# EAGLE board CT_schematic (EAGLE 7.6.0)

Size 100 x 80 mm. Coordinates in mm from the lower left corner, seen from the top.
Outline: 0,0 100,0 100,80 0,80 0,0
Copper layers (1*16): Top 0.035mm / dielectric 1.5mm / Bottom 0.035mm
Design rules "default": minimum track width 10mil, minimum drill 24mil, track to track 8mil, track to pad 8mil, pad to pad 8mil, via to via 8mil, smd to smd 8mil, copper to edge 40mil, drill to drill 8mil, minimum pad ring 10mil, minimum via ring 8mil, stop-mask expansion 4mil, vias tented up to drill 0mil, thermal gap 10mil

## Footprints (pad centres in the part's own frame; a part is rotated, then mirrored left to right if it is on the bottom)
C0603 = smd 0.8 x 0.8: 1 -0.762,0; 2 0.762,0
C0402 = smd 0.5 x 0.5: 1 -0.508,0; 2 0.508,0
C1210 = smd 1.2 x 2.5: 1 -1.524,0; 2 1.524,0
EXV-9H = smd 3.505 x 1.676: 1 -2.857,0; 2 2.857,0
L0603 = smd 0.8 x 0.8: 1 -0.762,0; 2 0.762,0
PJ-037B_PACKAGE = drill 3.7 square: 1 12,0 | drill 3.2 square: 2 6,0
R0603 = smd 0.8 x 0.8: 1 -0.762,0; 2 0.762,0
TFBGA64 = smd 0.35 x 0.35: A1 -1.75,1.75; A2 -1.25,1.75; A3 -0.75,1.75; A4 -0.25,1.75; A5 0.25,1.75; A6 0.75,1.75; A7 1.25,1.75; A8 1.75,1.75; B1 -1.75,1.25; B2 -1.25,1.25; B3 -0.75,1.25; B4 -0.25,1.25; B5 0.25,1.25; B6 0.75,1.25; B7 1.25,1.25; B8 1.75,1.25; C1 -1.75,0.75; C2 -1.25,0.75; C3 -0.75,0.75; C4 -0.25,0.75; C5 0.25,0.75; C6 0.75,0.75; C7 1.25,0.75; C8 1.75,0.75; D1 -1.75,0.25; D2 -1.25,0.25; D3 -0.75,0.25; D4 -0.25,0.25; D5 0.25,0.25; D6 0.75,0.25; D7 1.25,0.25; D8 1.75,0.25; E1 -1.75,-0.25; E2 -1.25,-0.25; E3 -0.75,-0.25; E4 -0.25,-0.25; E5 0.25,-0.25; E6 0.75,-0.25; E7 1.25,-0.25; E8 1.75,-0.25; F1 -1.75,-0.75; F2 -1.25,-0.75; F3 -0.75,-0.75; F4 -0.25,-0.75; F5 0.25,-0.75; F6 0.75,-0.75; F7 1.25,-0.75; F8 1.75,-0.75; G1 -1.75,-1.25; G2 -1.25,-1.25; G3 -0.75,-1.25; G4 -0.25,-1.25; G5 0.25,-1.25; G6 0.75,-1.25; G7 1.25,-1.25; G8 1.75,-1.25; H1 -1.75,-1.75; H2 -1.25,-1.75; H3 -0.75,-1.75; H4 -0.25,-1.75; H5 0.25,-1.75; H6 0.75,-1.75; H7 1.25,-1.75; H8 1.75,-1.75
ABLS-25.000MHZ-B2F-T = smd 5.6 x 2.8: 1 -3.81,0; 2 5.69,0
ASEK = smd 1.4 x 1: 1 -1.1,-0.8; 2 1.1,-0.8; 3 1.1,0.8; 4 -1.1,0.8
WSON-8 = smd 0.3 x 0.6: 1 -0.75,0; 2 0.05,0; 3 0.85,0; 4 1.65,0; 5 1.65,3.8; 6 0.85,3.8; 7 0.05,3.8; 8 -0.75,3.8 | smd 3 x 2.6: PAD 0.45,1.9
SON-6 = smd 0.55 x 0.3: 1 -0.355,0.5 | smd 0.52 x 0.3: 2 -0.37,0; 3 -0.37,-0.5; 4 0.37,-0.5; 5 0.37,0; 6 0.37,0.5
SW_4-1437565-2 = smd 1.4 x 2.1: 1 -2.23,4.55; 2 -2.23,-4.55; 3 2.23,4.55; 4 2.23,-4.55
LGM67K-G1J2-24-Z = smd 0.8 x 1.4: A -2,0; C 0,0
NC7SZ125M5X = smd 1.3 x 0.7: 1 -1.3,0.95; 2 -1.3,0; 3 -1.3,-0.95; 4 1.3,-0.95; 5 1.3,0.95
DUMMY_PACKAGE_82 = drill 0.3: 1 0,-1; 2 1.5,-1

## Placement (x,y rotation side)
C1  1e-07  [C0603]  -22.86,48.26 0 top  (outside the outline)
C2  1e-07  [C0603]  -26.67,48.26 0 top  (outside the outline)
C3  1e-07  [C0603]  -30.48,48.26 0 top  (outside the outline)
C4  1e-07  [C0603]  -34.29,48.26 0 top  (outside the outline)
C5  4.7e-06  [C0603]  -19.05,48.26 0 top  (outside the outline)
C6  1e-07  [C0603]  -38.1,48.26 0 top  (outside the outline)
C7  1e-08  [C0603]  -41.91,48.26 0 top  (outside the outline)
C8  1e-06  [C0603]  -45.72,48.26 0 top  (outside the outline)
C9  1e-07  [C0603]  -49.53,48.26 0 top  (outside the outline)
C10  1e-11  [C0402]  -30.48,53.34 0 top  (outside the outline)
C11  1e-11  [C0402]  -34.29,53.34 0 top  (outside the outline)
C12  1e-08  [C0402]  -38.1,53.34 0 top  (outside the outline)
C13  1e-06  [C0603]  -53.34,48.26 0 top  (outside the outline)
C14  1e-05  [C1210]  -49.53,35.56 0 top  (outside the outline)
C15  1e-07  [C0402]  -41.91,53.34 0 top  (outside the outline)
C16  0.0001  [EXV-9H]  -38.1,27.94 0 top  (outside the outline)
C17  0.0001  [EXV-9H]  -49.53,27.94 0 top  (outside the outline)
C18  1e-08  [C0402]  -45.72,53.34 0 top  (outside the outline)
F1  240.0  [L0603]  -15.24,53.34 0 top  (outside the outline)
J1  PJ-037B  [PJ-037B_PACKAGE]  -27.94,7.62 0 top  (outside the outline)
R2  1000.0  [R0603]  -19.05,53.34 0 top  (outside the outline)
R4  4700.0  [R0603]  -22.86,53.34 0 top  (outside the outline)
R5  10000.0  [R0603]  -48.26,41.91 0 top  (outside the outline)
R6  100000.0  [R0603]  -27.94,41.91 0 top  (outside the outline)
R7  153694.38  [R0603]  -22.86,41.91 0 top  (outside the outline)
R8  100000.0  [R0603]  -33.02,41.91 0 top  (outside the outline)
R9  10000.0  [R0603]  -53.34,41.91 0 top  (outside the outline)
R10  10000.0  [R0603]  -15.24,48.26 0 top  (outside the outline)
R11  9100.0  [R0603]  -26.67,53.34 0 top  (outside the outline)
R12  680000.0  [R0603]  -38.1,41.91 0 top  (outside the outline)
R13  120000.0  [R0603]  -43.18,41.91 0 top  (outside the outline)
U1  STM32L083RZH6  [TFBGA64]  -24.13,19.05 0 top  (outside the outline)
U2  ABLS-25.000MHZ-B2F-T  [ABLS-25.000MHZ-B2F-T]  -26.67,35.56 0 top  (outside the outline)
U3  ASEK-32.768KHz-ECST  [ASEK]  -29.21,27.94 0 top  (outside the outline)
U4  LP2951ACSDX/NOPB  [WSON-8]  -43.18,17.78 0 top  (outside the outline)
U5  TPS3895ADRYR  [SON-6]  -53.34,52.07 0 top  (outside the outline)
U6  4-1437565-2  [SW_4-1437565-2]  -44.45,6.35 0 top  (outside the outline)
U7  Q65110A2395  [LGM67K-G1J2-24-Z]  -38.1,35.56 0 top  (outside the outline)
U8  nc7sz125m5x  [NC7SZ125M5X]  -15.24,41.91 0 top  (outside the outline)
U9  Dummy  [DUMMY_PACKAGE_82]  -50.8,53.34 0 top  (outside the outline)

## Library data of the parts
C1-C18 F1 J1 R2 R4-R13 U1-U9 = circuit_tree

## Nets
CLK_CRYSTAL_U1_C1: C10.1 U1.C1 U2.1
CLK_CRYSTAL_U1_D1: C11.1 U1.D1 U2.2
CLK_U1_A1: U1.A1 U3.3
GND: C1.2 C2.2 C3.2 C4.2 C5.2 C6.2 C7.2 C8.2 C9.2 C10.2 C11.2 C12.2 C13.2 C14.2 C15.2 C16.2 C17.2 C18.2 J1.2 R2.2 R5.2 R8.2 R11.2 R13.2 U1.C2 U1.D4 U1.D5 U1.D6 U1.F1 U3.2 U4.3 U4.4 U4.PAD U5.2 U7.C U8.1 U8.3 U9.1
NET_U1_B2: C6.1 U1.B2
NET_U1_B4: R5.1 U1.B4
NET_U1_E1: R4.1 U1.E1 U8.4
NET_U1_H1: C7.1 C8.1 F1.1 U1.G1 U1.H1
NET_U1_H7: U7.A
NET_U1_H8: U6.3 U6.4
NET_U4_5: R6.1 U4.5
NET_U4_7: R7.2 R8.1 U4.7
NET_U5_1: R10.1 R11.1 U5.1
NET_U5_3: R12.2 R13.1 U5.3
NET_U5_4: R9.1 U5.4 U8.2
NET_U6_1: R2.1 U6.1 U6.2
PROC_DAC_OUT2: U1.F4 U9.2
VCC_S1_5V9: C13.1 C16.1 C17.1 J1.1 U4.8
VCC_TIER1_3V3: C1.1 C2.1 C3.1 C4.1 C5.1 C9.1 C12.1 C14.1 C15.1 C18.1 F1.2 R4.2 R6.2 R7.1 R9.2 R10.2 R12.1 U1.D2 U1.E4 U1.E5 U1.E6 U3.4 U4.1 U5.6 U8.5

## Tracks (layer width: path | path; a pad name or v marks a point on that pad's centre or on a via)
CLK_CRYSTAL_U1_C1  (2 unrouted)
CLK_CRYSTAL_U1_D1  (2 unrouted)
CLK_U1_A1  (1 unrouted)
GND  (37 unrouted)
NET_U1_B2  (1 unrouted)
NET_U1_B4  (1 unrouted)
NET_U1_E1  (2 unrouted)
NET_U1_H1  (4 unrouted)
NET_U1_H8  (1 unrouted)
NET_U4_5  (1 unrouted)
NET_U4_7  (2 unrouted)
NET_U5_1  (2 unrouted)
NET_U5_3  (2 unrouted)
NET_U5_4  (2 unrouted)
NET_U6_1  (2 unrouted)
PROC_DAC_OUT2  (1 unrouted)
VCC_S1_5V9  (4 unrouted)
VCC_TIER1_3V3  (24 unrouted)